# EAGLE board Schéma_projet_Routage_Pi4B (EAGLE 9.7.0)
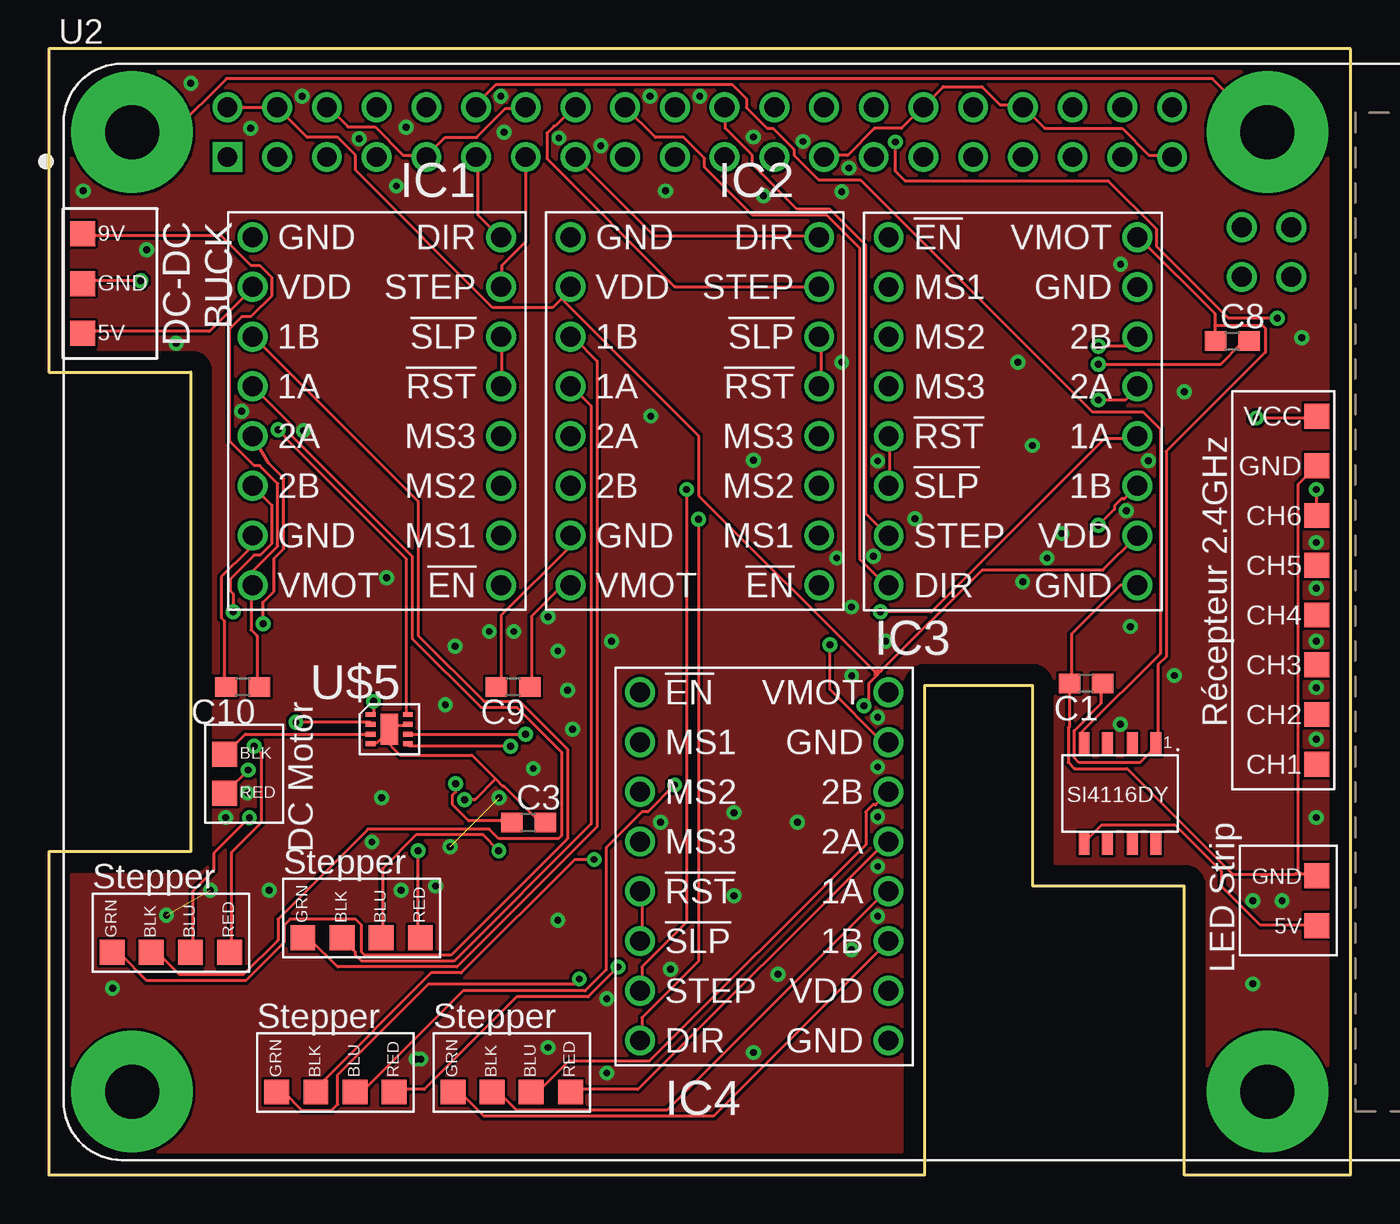
[diagram p0: board, top side]
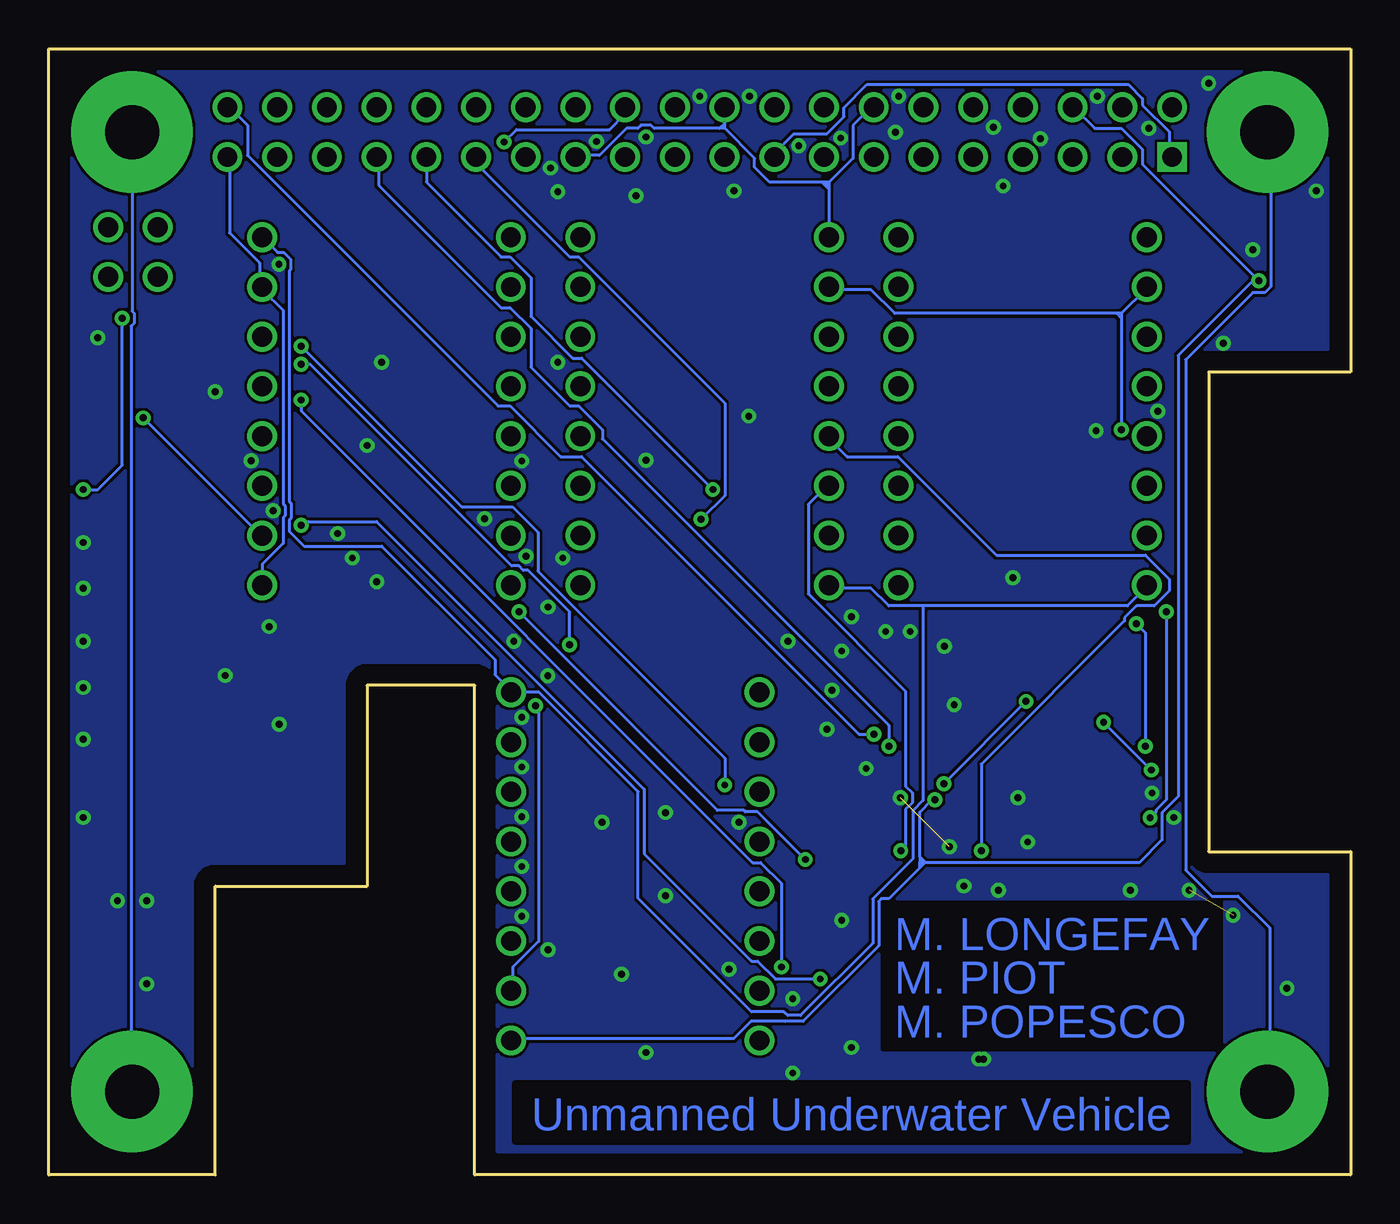
[diagram p1: board, bottom side, seen from below]

Size 66.5 x 57.5 mm. Coordinates in mm from the lower left corner, seen from the top.
Outline: 44.75,0 44.75,25 50.25,25 50.25,14.75 58,14.75 58,0 66.5,0 66.5,57.5 0,57.5 0,41 7.25,41 7.25,16.5 0,16.5 0,0 44.75,0
Copper layers (1*16): Top / Bottom
Stack-up Default Layer Stack: Top User Defined 0.035mm / Dielectric-1 User Defined 1.5mm / Bottom User Defined 0.035mm
Design rules "default": minimum track width 6mil, minimum drill 0.35mm, track to track 6mil, track to pad 6mil, pad to pad 6mil, via to via 6mil, smd to smd 6mil, copper to edge 40mil, drill to drill 6mil, minimum pad ring 10mil, minimum via ring 8mil, stop-mask expansion 4mil, vias tented up to drill 0mil, thermal gap 10mil

## Footprints (pad centres in the part's own frame; a part is rotated, then mirrored left to right if it is on the bottom)
C0603 = smd 1.1 x 1: 1 -0.85,0; 2 0.85,0
A4988 = drill 1.016: 1 -6.35,8.89; 2 -6.35,6.35; 3 -6.35,3.81; 4 -6.35,1.27; 5 -6.35,-1.27; 6 -6.35,-3.81; 7 -6.35,-6.35; 8 -6.35,-8.89; 9 6.35,-8.89; 10 6.35,-6.35; 11 6.35,-3.81; 12 6.35,-1.27; 13 6.35,1.27; 14 6.35,3.81; 15 6.35,6.35; 16 6.35,8.89
MODULE_RASPBERRY_PI_4B_4GB = drill 1.016 square: 1 -34.13,23.23 | drill 1.016: 2 -34.13,25.77; 3 -31.59,23.23; 4 -31.59,25.77; 5 -29.05,23.23; 6 -29.05,25.77; 7 -26.51,23.23; 8 -26.51,25.77; 9 -23.97,23.23; 10 -23.97,25.77; 11 -21.43,23.23; 12 -21.43,25.77; 13 -18.89,23.23; 14 -18.89,25.77; 15 -16.35,23.23; 16 -16.35,25.77; 17 -13.81,23.23; 18 -13.81,25.77; 19 -11.27,23.23; 20 -11.27,25.77; 21 -8.73,23.23; 22 -8.73,25.77; 23 -6.19,23.23; 24 -6.19,25.77; 25 -3.65,23.23; 26 -3.65,25.77; 27 -1.11,23.23; 28 -1.11,25.77; 29 1.43,23.23; 30 1.43,25.77; 31 3.97,23.23; 32 3.97,25.77; 33 6.51,23.23; 34 6.51,25.77; 35 9.05,23.23; 36 9.05,25.77; 37 11.59,23.23; 38 11.59,25.77; 39 14.13,23.23; 40 14.13,25.77; 41 20.23,17.107; 42 20.23,19.647; 43 17.69,17.107; 44 17.69,19.647 | drill 2.75 pad 6.2: S1 -39,24.5; S2 19,24.5; S3 19,-24.5; S4 -39,-24.5
17HS08-1004S = smd 1.27 x 1.27: P$1 -3,0; P$2 -1,0; P$3 1,0; P$4 3,0
DRV8838 = smd 0.5 x 0.25: 1 -0.95,0.75; 2 -0.95,0.25; 3 -0.95,-0.25; 4 -0.95,-0.75; 5 0.95,-0.75; 6 0.95,-0.25; 7 0.95,0.25; 8 0.95,0.75 | smd 0.9 x 1.6: 9 0,0
DC_MOTOR = smd 1.27 x 1.27: P$1 -1,-1.27; P$2 1,-1.27
FS-IA6B = smd 1.27 x 1.27: P$1 -8.89,0; P$2 -6.35,0; P$3 -3.81,0; P$4 -1.27,0; P$5 1.27,0; P$6 3.81,0; P$7 6.35,0; P$8 8.89,0
SI4116DY = smd 0.559 x 1.194: P$1 1.829,-2.527; P$2 1.829,2.527; P$3 -1.829,-2.527; P$4 -0.635,2.527; P$5 0.635,2.527; P$6 -0.635,-2.527; P$7 0.635,-2.527; P$8 -1.829,2.527
LED_STRIP = smd 1.27 x 1.27: P$1 -1.27,0; P$2 1.27,0
DFR0753 = smd 1.27 x 1.27: P$1 -2.54,0; P$2 0,0; P$3 2.54,0

## Placement (x,y rotation side)
C1  100u  [C0603]  52.99,25.09 180 top
C3  0.1u  [C0603]  24.5,18 0 top
C8  100u  [C0603]  60.45,42.58 0 top
C9  100u  [C0603]  23.71,24.91 180 top
C10  100u  [C0603]  9.9,24.91 180 top
IC1  1182-A4988  [A4988]  16.75,39 180 top
IC2  1182-A4988  [A4988]  33,39 180 top
IC3  1182-A4988  [A4988]  49.25,38.99 0 top
IC4  1182-A4988  [A4988]  36.55,15.75 0 top
U2  RASPBERRY_PI_4B_4GB  [MODULE_RASPBERRY_PI_4B_4GB]  43.25,28.75 0 top
U$1  17HS08-1004S  [17HS08-1004S]  6.23,11.36 0 top
U$2  17HS08-1004S  [17HS08-1004S]  15.98,12.11 0 top
U$3  17HS08-1004S  [17HS08-1004S]  14.64,4.23 0 top
U$4  17HS08-1004S  [17HS08-1004S]  23.64,4.23 0 top
U$5  DRV8838  [DRV8838]  17.39,22.76 0 top
U$6  DC_MOTOR  [DC_MOTOR]  10.25,20.48 270 top
U$7  FS-IA6B  [FS-IA6B]  64.77,29.86 90 top
U$8  SI4116DY  [SI4116DY]  54.72,19.47 180 top
U$10  LED_STRIP  [LED_STRIP]  64.77,14 90 top
U$11  DFR0753  [DFR0753]  1.73,45.52 270 top

## Library data of the parts
C1 C3 C8-C10 = rcl; SPICEPREFIX: C
IC1-IC4 = pololu-stepper-driver
U2 = RASPBERRY_PI_4B_4GB; MANUFACTURER: Raspberry Pi; MAXIMUM_PACKAGE_HEIGHT: 16 mm; PARTREV: 4; SNAPEDA_PN: RASPBERRY PI 4B/4GB; STANDARD: Manufacturer Recommendations
U$1-U$4 U$6 U$7 U$10 = Bibliothèque_3S04
U$5 U$8 U$11 = Bibliothèque

## Nets
3V3: U2.1 U2.17
5V: IC1.10 IC2.10 IC3.10 IC4.10 U2.2 U2.4 U$5.8 U$7.P$8 U$11.P$3
+9V: C1.1 C8.1 C9.1 C10.1 IC1.16 IC2.16 IC3.16 IC4.16 U$8.P$3 U$11.P$1
AGND: C1.2 C3.2 IC2.9 IC3.9 IC3.15 IC4.9 U2.6 U2.9 U2.14 U2.20 U2.25 U2.30 U2.34 U2.39 U$5.4 U$5.7 U$5.9 U$7.P$7 U$10.P$2 U$11.P$2
CH1: U$7.P$1
CH2: U$7.P$2
CH3: U$7.P$3
CH4: U$7.P$4
CH5: U$7.P$5
CH6: U2.24 U$7.P$6
N$1: C8.2 IC4.15
N$2: U$5.3 U$6.P$1
N$3: U$5.2 U$6.P$2
N$4: IC1.12 U$1.P$2
N$5: IC1.11 U$1.P$1
N$6: IC1.13 U$1.P$4
N$7: IC1.14 U$1.P$3
N$8: IC2.12 U$2.P$2
N$9: IC2.11 U$2.P$1
N$10: IC2.13 U$2.P$4
N$11: IC2.14 U$2.P$3
N$12: IC3.12 U$3.P$2
N$13: IC3.11 U$3.P$1
N$14: IC3.13 U$3.P$4
N$15: IC3.14 U$3.P$3
N$16: IC4.12 U$4.P$2
N$17: IC4.11 U$4.P$1
N$18: IC4.13 U$4.P$4
N$19: IC4.14 U$4.P$3
N$20: C3.1 U$5.1
N$21: U$8.P$2 U$10.P$1
N$28: IC4.5 IC4.6
N$29: IC3.5 IC3.6
N$30: IC2.5 IC2.6
N$31: IC1.5 IC1.6
N$35: IC1.9
N$37: C10.2 IC1.15
N$38: C9.2 IC2.15
N$47: U2.32
N$49: U2.36
N$51: U2.35
N$53: U2.38
N$55: U2.37
R4-GPIO05: IC4.8 U2.29
R4-GPIO06: IC4.7 U2.31
R4-GPIO13: U2.33 U$5.5
R4-GPIO17: IC1.8 U2.11
R4-GPIO18: U2.12 U$8.P$1
R4-GPIO21: U2.40 U$5.6
R4-GPIO22: IC2.8 U2.15
R4-GPIO23: IC2.7 U2.16
R4-GPIO24: IC3.8 U2.18
R4-GPIO25: IC3.7 U2.22
R4-GPIO27: IC1.7 U2.13
SHIELD: U2.S1 U2.S2 U2.S3 U2.S4

## Tracks (layer width: path | path; a pad name or v marks a point on that pad's centre or on a via)
3V3
  Bottom 0.152: U2.1 9.27,52.07 9.27,53.26 10.64,54.63 10.64,54.96 11.36,55.69 24.7,55.69 25.88,54.51 25.88,54.05 26.76,53.17 28.44,53.17 29.44,52.17 U2.17
5V  (via drill 0.35)
  Top 0.152: v61.69,38.66 64.74,38.66 U$7.P$8 | U2.2 9.27,54.51 11.55,54.51 U2.4 13.2,52.98 14.75,52.98 15.67,52.07 15.67,51.3 22.68,44.3 25.72,44.3 26.18,44.75 | U$5.8 18.26,23.57 18.26,31.45 12.09,37.62 12.09,37.66 v11.7,38.05 | IC1.10 10.33,45.21 8.2,43.08 1.83,43.08 U$11.P$3 | 26.18,44.75 26.64,45.21 IC2.10 26.18,44.75 | 42.19,25.69 33.19,34.69 33.19,37.74 26.18,44.75 | v41.64,23.96 41.88,24.2 41.88,25.09 42.19,25.41 | 42.52,25.73 47.68,30.89 53.85,30.89 IC3.10 | 42.19,25.69 42.23,25.73 42.52,25.73 | 42.19,25.41 42.27,25.48 | 42.27,25.48 42.52,25.73 | 42.19,25.69 42.19,25.41 | 42.19,25.69 42.27,25.62 42.27,25.48
  Bottom 0.152: v61.69,38.66 55.75,32.71 IC3.10 | IC4.10 42.79,9.55 42.79,10.61 41.48,11.93 41.48,23.87 41.57,23.96 v41.64,23.96 | 11.7,43.99 11.7,43.75 | 11.7,43.75 v11.7,38.05 | 11.7,43.99 10.48,45.21 IC1.10 | 11.7,43.99 11.94,43.99 | 11.94,43.99 23.29,43.99 24.5,45.21 26.64,45.21 IC2.10 | 11.7,43.75 11.94,43.99
+9V
  Top 0.152: C1.1 53.77,24.98 53.77,24.07 52.38,22.69 52.38,21.3 52.63,21.05 55.75,21.05 56.66,21.97 U$8.P$3 56.66,22.12 56.66,26.05 57.08,26.47 57.08,36.94 62.15,42.01 62.15,43.23 61.99,43.38 59.56,43.38 | 59.56,43.38 59.56,43.99 55.75,47.8 IC3.16 | 59.56,43.38 59.56,42.62 C8.1 | C9.1 24.66,24.94 24.66,28.52 26.25,30.11 IC2.16 | C10.1 10.64,24.94 10.64,27.53 10.33,27.84 10.33,29.97 IC1.16 10.4,30.82 11.7,32.11 11.7,35.3 10.77,36.22 10.48,36.22 9.23,37.47 9.23,43.2 9.87,43.84 10.33,43.84 11.4,44.9 11.4,45.82 10.79,46.43 10.33,46.43 8.81,47.95 1.8,47.95 U$11.P$1
  Bottom 0.152: 21.84,29.05 11.4,29.05 10.48,29.97 IC1.16 | 21.84,29.05 23.59,29.05 24.5,29.97 26.64,29.97 IC2.16 | IC3.16 54.82,47.11 54.5,47.11 54.14,46.75 54.14,46.25 54.22,46.17 54.22,34.38 54.13,34.29 54.13,33.54 54.22,33.45 54.22,32.86 53.47,32.11 49.5,32.11 43.71,26.32 43.71,25.55 42.95,24.79 IC4.16 42.79,24.64 41.46,24.64 36.39,19.57 36.39,14.12 30.6,8.33 28.94,8.33 28.75,8.14 28.1,8.14 24.41,11.83 24.41,14.1 22.37,16.14 22.37,18.59 21.84,19.12 21.84,29.05
AGND  (via drill 0.35)
  Top 0.152: 17.04,22.35 17.34,22.65 U$5.9 | 17.04,22.35 16.73,22.04 16.58,22.04 U$5.4 | U$5.7 18.26,22.96 17.65,22.96 17.49,22.81 U$5.9 | 22.83,20.22 21.61,21.43 17.95,21.43 17.04,22.35 | C3.2 25.27,18.08 25.03,18.08 23.25,19.86 23.19,19.86 22.83,20.22 | 17.04,22.35 U$5.9 | 22.83,20.22 21.76,19.15 v21.23,19.15 | IC3.9 54.73,30.1 52.24,27.62 52.24,25.14 C1.2 52.14,22.88 52.08,22.81 52.08,21.07 52.39,20.75 55.09,20.75 60.49,15.34 63.66,15.34 | 64,15.34 64.74,15.34 U$10.P$2 | U2.25 39.74,52.07 40.81,52.07 42.18,53.44 43.55,53.44 44.62,54.51 U2.30 44.77,54.66 45.69,55.57 47.67,55.57 48.58,54.66 49.65,54.66 U2.34 49.8,54.51 50.87,53.44 54.83,53.44 56.2,52.07 57.27,52.07 U2.39 | v4.69,45.67 1.8,45.67 U$11.P$2 | U2.6 14.29,54.51 15.28,53.52 16.66,53.52 18.1,52.07 19.17,52.07 U2.9 19.32,52.07 20.24,52.98 21.85,52.98 23.34,54.47 24.31,54.47 U2.14 | 63.82,15.5 63.82,35.26 U$7.P$7 | 63.82,15.5 63.66,15.34 | 63.82,15.5 63.84,15.5 64,15.34 | 64,15.34 63.66,15.34
  Bottom 0.152: 22.01,16.25 22.01,15.99 | 22.01,15.75 22.01,15.95 | 22.01,15.75 22.01,15.69 | IC4.9 42.79,6.96 31.52,6.96 30.62,7.85 28.89,7.85 28.88,7.84 27.97,7.84 24.11,11.71 24.11,13.97 23.97,14.1 23.6,14.1 22.01,15.69 | U2.39 57.27,51.91 57.27,48.1 55.75,46.58 55.75,45.36 IC3.15 55.59,45.21 54.53,44.14 54.53,34.26 54.44,34.17 54.44,33.66 54.53,33.57 54.53,32.26 55.59,31.19 55.59,30.12 IC3.9 | 4.84,45.82 10.64,51.61 10.64,52.37 11.7,53.44 13.07,53.44 14.14,54.51 U2.6 | 26.64,50.7 26.64,50.5 | 26.64,50.5 26.64,50.33 | 26.64,50.33 26.64,47.95 IC2.9 | 26.64,50.7 25.42,51.91 25.42,53.59 24.5,54.51 U2.14 | 31.97,53.44 31.97,53.72 | 31.97,53.72 31.97,54.51 U2.20 | 31.97,53.44 30.45,51.91 30.45,51.46 29.69,50.7 27,50.7 | 26.64,50.7 26.75,50.7 | 26.75,50.7 27,50.7 | U2.25 39.59,52.07 38.37,52.07 37,53.44 36.42,53.44 36.25,53.61 35.75,53.61 35.58,53.44 32.25,53.44 | 21.75,15.95 10.79,15.95 9.63,17.11 9.63,18.5 8.81,19.33 8.81,41.86 4.84,45.82 | 21.81,15.95 22.01,15.95 | 4.84,45.82 v4.69,45.67 | 31.97,53.44 32.25,53.44 | 22.01,15.75 21.81,15.95 | 21.81,15.95 21.75,15.95 | 21.75,15.95 21.75,15.99 21.88,16.12 | 21.88,16.12 22.01,16.25 | 22.01,15.95 22.01,15.99 | 22.01,15.99 21.88,16.12 | 21.75,15.95 22.01,15.69 | 26.64,50.5 26.75,50.61 26.75,50.7 | 27,50.7 26.64,50.33 | 31.97,53.72 32.25,53.44 | 22.01,16.25 22.01,18.52 21.38,19.15 v21.23,19.15
CH6  (via drill 0.35)
  Top 0.152: U$7.P$6 64.72,33.72 64.75,33.75 v64.75,35 | v62.75,43.75 60.25,43.75 56.59,47.41 56.59,48.3 54.13,50.75 43.75,50.75 43.25,51.25 v43.25,52.75
  Bottom 0.152: v64.75,35 64,35 62.75,36.25 v62.75,43.75 | U2.24 37.06,54.19 37.87,53.38 42.62,53.38 v43.25,52.75
GND  (via drill 0.35)  (2 unrouted)
  other vias: 7.25,55.75 1.75,50.25 5,47.25 6.5,42.47 13,38 17.25,30.5 3.25,9.53 16.5,17 20.5,16.75 9.84,39 36,6.25 37.25,10.25 38.25,18 35,14.25 26,13 18.25,53.5 23.25,53.25 17.75,50.5 30.75,38.75 31.5,50.25 33.25,55.08 30.71,55.08 23.09,55.08 15.84,52.91 36,53 36.5,50 49.5,41.5 40.87,51.42 40.5,50.21 58,40 55.04,33.91 42.34,36.45 55.25,28 57.5,25.5 61.5,14 61.5,9.75 64.75,18.25 64.75,22.25 64.75,24.88 64.75,27.25 64.75,29.96 64.75,32.3 64,42.75 54.75,46.5 50.25,37.25 36,36.5 40.5,41.5 41,29 44.25,33.5 42.13,31.59 42.34,13.21 42.34,15.75 42.34,18.29 42.34,20.83 42.34,23.37 51.75,32.75 41.01,25.49 10.3,53.45 12.93,55.08 10.14,19.5 20.25,24 24.75,20.75 26.5,24.75 23.75,27.75 25.5,6.5 31.75,10.5 28.5,9 31.25,18 28.19,52.56 26.05,52.95 38.52,52.77 23,19.25 28.75,27.25 26,26.75 26.75,22.75 25.5,28.5 22.5,27.75 20.75,27 63,14 19.75,14.75 17,19.25 41,11.5 35,18.5 42.75,27.25 40.25,31.5 49.75,30.29 51,31.5 54.74,23.01 56.17,36.47 9.03,18.25 28.5,5.2 18,14.53 11.25,14.53 8.25,14.53 6,13.25 19,5.91 18.75,5.91
  pour Top: -0.5,53.5 -0.5,5.25 4.5,0.25 62.5,0.25 66.75,4.5 66.75,53 61.75,58 4,58
  pour Bottom: -0.5,54 -0.5,4.5 3.75,0.25 62.25,0.25 66.75,4.75 66.75,52.75 61.5,58 3.5,58
N$1  (via drill 0.35)
  Top 0.152: v53.61,41.4 59.86,41.4 60.93,42.47 61.23,42.47 C8.2 | v39.9,27.07 39.9,24.79 42.49,22.2 42.79,22.2 IC4.15
  Bottom 0.152: v53.61,41.4 53.16,41.4 42.85,31.09 42.49,31.09 42.27,30.88 42.02,30.88 39.9,28.75 v39.9,27.07
N$2
  Top 0.152: U$5.3 16.43,22.5 10.03,22.5 9.11,21.59 U$6.P$1
N$3  (via drill 0.35)
  Top 0.152: v12.62,23.11 16.43,23.11 U$5.2 | v10.18,20.67 9.11,19.61 U$6.P$2
  Bottom 0.152: v10.18,20.67 v12.62,23.11
N$4
  Top 0.152: U$1.P$2 5.36,11.24 5.66,11.24 6.67,10.22 9.93,10.22 11.7,11.99 11.7,13.06 16.3,17.66 22.49,17.66 22.98,17.17 26.03,17.17 26.18,17.32 26.18,21.59 23.89,23.87 22.07,23.87 18.56,27.38 18.56,31.58 12.39,37.75 12.39,38.27 IC1.12
N$5
  Top 0.152: U$1.P$1 3.38,11.24 3.68,11.24 5,9.92 10.06,9.92 12.01,11.87 12.01,12.75 12.31,13.05 15.67,13.05 15.97,12.75 15.97,11.38 16.12,11.22 20.54,11.22 26.49,17.17 26.49,21.74 24.05,24.18 22.22,24.18 18.87,27.53 18.87,34.39 10.48,42.77 IC1.11
N$6  (via drill 0.35)
  Top 0.152: U$1.P$4 9.32,11.39 9.32,16.46 10.85,17.98 10.85,21.53 v10.48,21.89 | IC1.13 11.22,36.35 12,35.57 12,31.99 11.5,31.49 11.5,29.81 10.94,29.25 v10.94,28.14
  Bottom 0.152: v10.48,21.89 10.48,27.68 v10.94,28.14
N$7  (via drill 0.35)
  Top 0.152: v9.42,28.75 9.42,29.66 9.27,29.82 9.27,30.43 10.48,31.65 10.8,31.65 11.39,32.24 11.39,34.2 IC1.14 | U$1.P$3 7.34,11.47 7.34,14.48 8.42,15.56 8.42,16.41 v10.24,18.23
  Bottom 0.152: v9.42,28.75 9.42,19.15 9.94,18.63 9.94,18.54 v10.24,18.23
N$8
  Top 0.152: U$2.P$2 15.06,11.99 15.67,11.38 15.67,11.22 15.97,10.92 20.7,10.92 27.7,17.93 27.7,39.27 26.79,40.18 IC2.12
N$9
  Top 0.152: U$2.P$1 13.07,11.99 13.38,11.99 14.75,10.61 20.85,10.61 28.01,17.78 28.01,41.55 26.79,42.77 IC2.11
N$10  (via drill 0.35)
  Top 0.152: v18.87,16.56 18.87,12.14 U$2.P$4
  Bottom 0.152: v18.87,16.56 18.87,20.98 11.55,28.29 11.55,28.45 10.94,29.05 10.03,29.05 9.27,29.82 9.27,30.43 10.48,31.65 18.1,31.65 23.13,36.67 25.72,36.67 26.64,37.59 IC2.13
N$11  (via drill 0.35)
  Top 0.152: U$2.P$3 17.04,12.14 17.04,15.64 18.75,17.36 22.18,17.36 v22.98,16.56
  Bottom 0.152: v22.98,16.56 22.73,16.81 22.73,18.66 22.39,19 22.39,19.5 22.73,19.84 22.73,24.69 27.7,29.66 27.7,34.24 26.79,35.15 IC2.14
N$12  (via drill 0.35)
  Top 0.152: v27.86,16.1 26.86,16.1 21.07,10.31 19.52,10.31 13.64,4.43 U$3.P$2 | v42.49,28.75 45.08,28.75 53.92,37.59 55.59,37.59 IC3.12
  Bottom 0.152: v27.86,16.1 30.3,18.54 30.93,18.54 31,18.61 32.34,18.61 v42.49,28.75
N$13  (via drill 0.35)
  Top 0.152: U$3.P$1 11.7,4.21 12.01,4.21 12.92,3.3 14.45,3.3 14.75,3.6 14.75,5.11 19.4,9.76 26.85,9.76 v27.1,10.01 | v53.61,33.17 54.44,33.99 54.44,34.17 54.79,34.52 54.94,34.52 IC3.11
  Bottom 0.152: v27.1,10.01 29.38,10.01 30.3,10.92 30.6,10.92 36.09,16.41 36.09,19.69 49.75,33.36 53.25,33.36 53.44,33.17 v53.61,33.17
N$14  (via drill 0.35)
  Top 0.152: v29.08,10.61 27.55,9.09 23.89,9.09 19.17,4.37 17.65,4.37 U$3.P$4 | v53.61,39.57 54.98,39.57 55.59,40.18 IC3.13
  Bottom 0.152: v29.08,10.61 29.08,14.88 30.14,15.95 30.55,15.95 53.61,39.02 v53.61,39.57
N$15  (via drill 0.35)
  Top 0.152: v31.97,19.91 30.6,18.54 30.3,18.54 28.47,16.71 28.47,10.46 27.4,9.39 21.15,9.39 16.12,4.37 15.67,4.37 U$3.P$3 | v53.61,42.31 55.14,42.31 55.59,42.77 IC3.14
  Bottom 0.152: v31.97,19.91 31.97,21.28 41.52,30.83 41.52,32.81 42.82,34.11 45.41,34.11 v53.61,42.31
N$16
  Top 0.152: U$4.P$2 22.68,4.21 22.98,4.21 23.89,3.3 31.57,3.3 42.75,14.48 IC4.12
N$17
  Top 0.152: U$4.P$1 20.7,4.21 21,4.21 22.22,2.99 33.95,2.99 42.79,11.83 IC4.11
N$18
  Top 0.152: U$4.P$4 26.79,4.37 30.1,4.37 42.75,17.02 IC4.13
N$19
  Top 0.152: U$4.P$3 24.66,4.37 25.11,4.37 26.55,5.81 30.67,5.81 41.73,16.87 41.73,18.54 42.09,18.9 42.23,18.9 IC4.14
N$20  (via drill 0.35)
  Top 0.152: v16.58,24.18 16.58,23.57 U$5.1 | C3.1 23.59,18.08 21.44,18.08 20.62,18.9 20.62,19.4 20.78,19.55 v20.78,19.98
  Bottom 0.152: v20.78,19.98 v16.58,24.18
N$21
  Top 0.152: U$8.P$2 53,17.09 53.77,17.85 57.55,17.85 59.92,15.48 59.92,14.72 61.89,12.75 64.74,12.75 U$10.P$1
N$28
  Top 0.152: IC4.6 30.3,11.99 30.3,14.42 IC4.5
N$29
  Top 0.152: IC3.5 42.95,37.67 42.95,35.23 IC3.6
N$30
  Top 0.152: IC2.5 39.44,40.33 39.44,42.77 IC2.6
N$31
  Top 0.152: IC1.5 23.13,40.33 23.13,42.77 IC1.6
N$37
  Top 0.152: IC1.15 10.17,32.42 10.17,31.9 8.81,30.54 8.81,28.45 8.96,28.29 8.96,24.94 C10.2
N$38
  Top 0.152: IC2.15 26.64,32.56 26.64,32.1 23.11,28.57 23.11,25.16 C9.2
R4-GPIO05  (via drill 0.35)
  Top 0.152: v33.19,33.47 33.19,10.92 30.3,8.02 30.3,6.96 IC4.8
  Bottom 0.152: v33.19,33.47 31.97,34.69 31.97,39.42 39.44,46.89 39.9,46.89 44.62,51.61 44.62,51.91 U2.29
R4-GPIO06  (via drill 0.35)
  Top 0.152: v32.58,35 32.58,12.9 30.3,10.61 30.3,9.55 IC4.7
  Bottom 0.152: v32.58,35 39.29,41.7 39.74,41.7 41.88,43.84 41.88,45.82 42.95,46.89 43.4,46.89 47.21,50.7 47.21,51.91 U2.31
R4-GPIO13  (via drill 0.35)
  Top 0.152: v23.59,21.89 18.41,21.89 U$5.5
  Bottom 0.152: v23.59,21.89 23.59,22.96 38.22,37.59 38.22,38.05 39.44,39.27 39.9,39.27 41.88,41.25 41.88,43.23 42.95,44.3 43.4,44.3 49.65,50.54 49.65,51.91 U2.33
R4-GPIO17
  Top 0.152: U2.11 21.91,51.91 21.91,49.02 22.98,47.95 IC1.8
R4-GPIO18
  Top 0.152: U$8.P$1 52.89,22.24 52.75,22.38 52.75,22.6 56.78,26.62 56.78,38.08 55.9,38.96 53.31,38.96 41.45,50.81 39.32,50.81 38.07,52.07 38.07,52.37 37,53.44 36.7,53.44 35.63,54.51 35.63,54.96 34.91,55.69 22.84,55.69 21.82,54.67 U2.12
R4-GPIO21  (via drill 0.35)
  Top 0.152: v24.35,22.5 18.41,22.5 U$5.6
  Bottom 0.152: v24.35,22.5 25.11,22.5 39.29,36.67 40.35,36.67 42.95,39.27 43.55,39.27 56.36,52.07 56.36,53.59 57.27,54.51 U2.40
R4-GPIO22
  Top 0.152: IC2.8 39.29,47.95 30.91,47.95 26.94,51.91 U2.15
R4-GPIO23
  Top 0.152: IC2.7 39.29,45.36 31.97,45.36 25.44,51.9 25.44,53.2 25.8,53.56 25.85,53.56 26.79,54.51 U2.16
R4-GPIO24
  Top 0.152: U2.18 30.98,52.98 32.43,52.98 33.5,51.91 33.5,51.46 35.94,49.02 39.74,49.02 41.43,47.33 41.43,31.43 42.75,30.1 IC3.8
R4-GPIO25
  Top 0.152: U2.22 34.56,54.51 34.56,53.44 35.94,52.07 35.94,51.61 38.22,49.32 39.9,49.32 41.73,47.49 41.73,33.77 42.79,32.71 IC3.7
R4-GPIO27
  Top 0.152: IC1.7 23.13,45.36 23.13,46.43 24.35,47.65 24.35,51.91 U2.13
SHIELD
  Top 0.152: U2.S1 4.39,53.29 6.37,53.29 9.07,55.99 59.44,55.99 62.15,53.29 U2.S2
  Bottom 0.152: U2.S4 4.25,4.5 4.14,4.61 4.14,12.61 5.76,14.23 7.09,14.23 8.42,15.56 8.42,41.64 5,45.06 4.39,45.06 4.08,45.36 4.08,52.98 4.24,53.13 U2.S1 | U2.S2 62.25,44.11 62.14,44 62.14,43.5 62.3,43.34 62.3,4.3 U2.S3

## Text on the board
Bottom: M. LONGEFAY / M. PIOT / M. POPESCO | Unmanned Underwater Vehicle